# Altium PCB PCB.PcbDoc (part 1 of 2)
Units mm, origin at the board's own origin, x right, y up, seen from the top; angles counter-clockwise.
Board outline 90.42 x 81.53 mm, 4 copper layers (Top Copper, PWR, GND, Bottom Copper), stack 1.57 mm thick; 86 components, 100 nets, 390 pads, 138 vias.
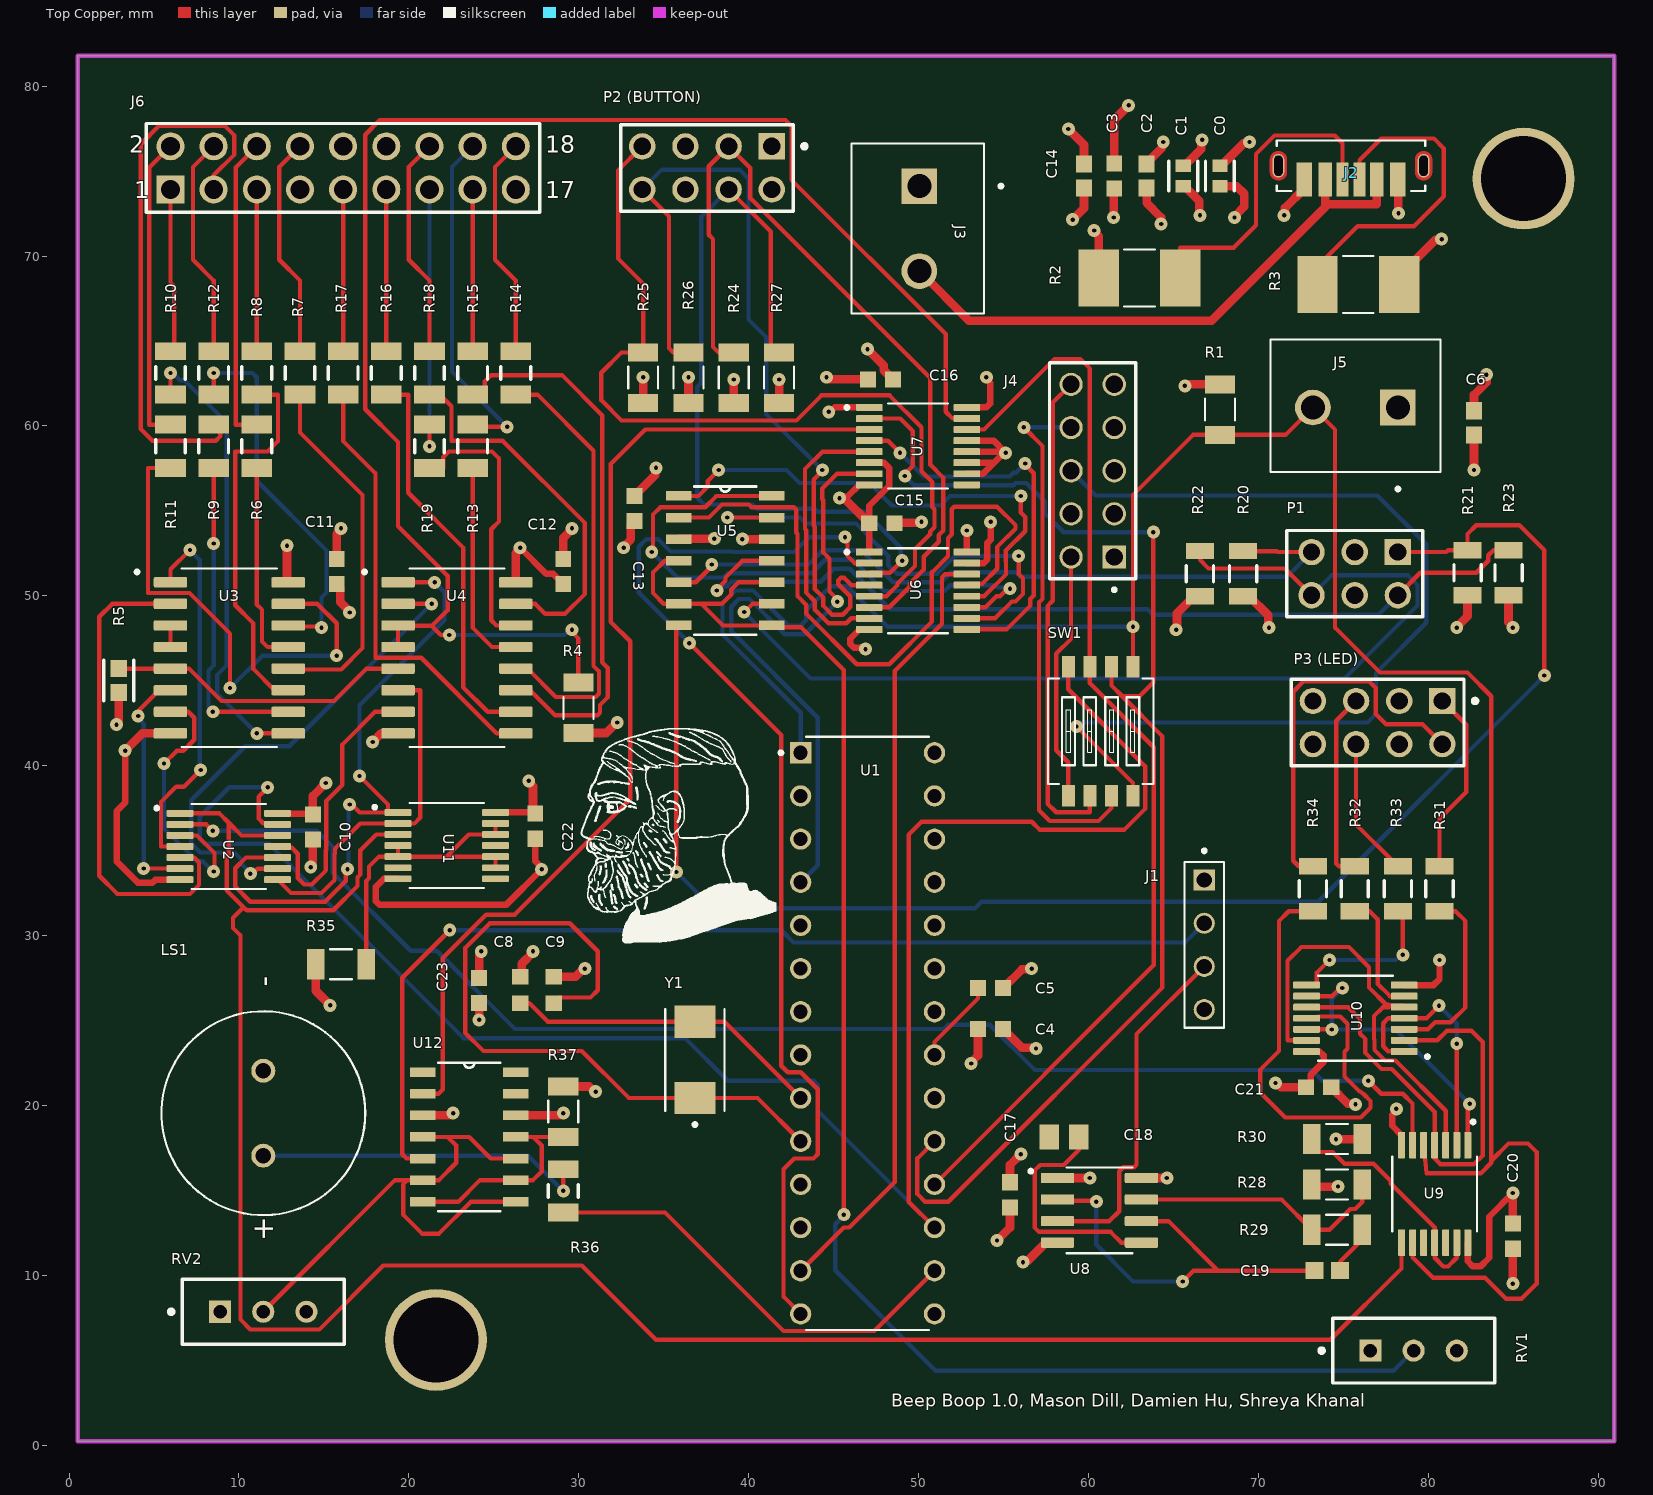
[diagram p0: Top Copper view]
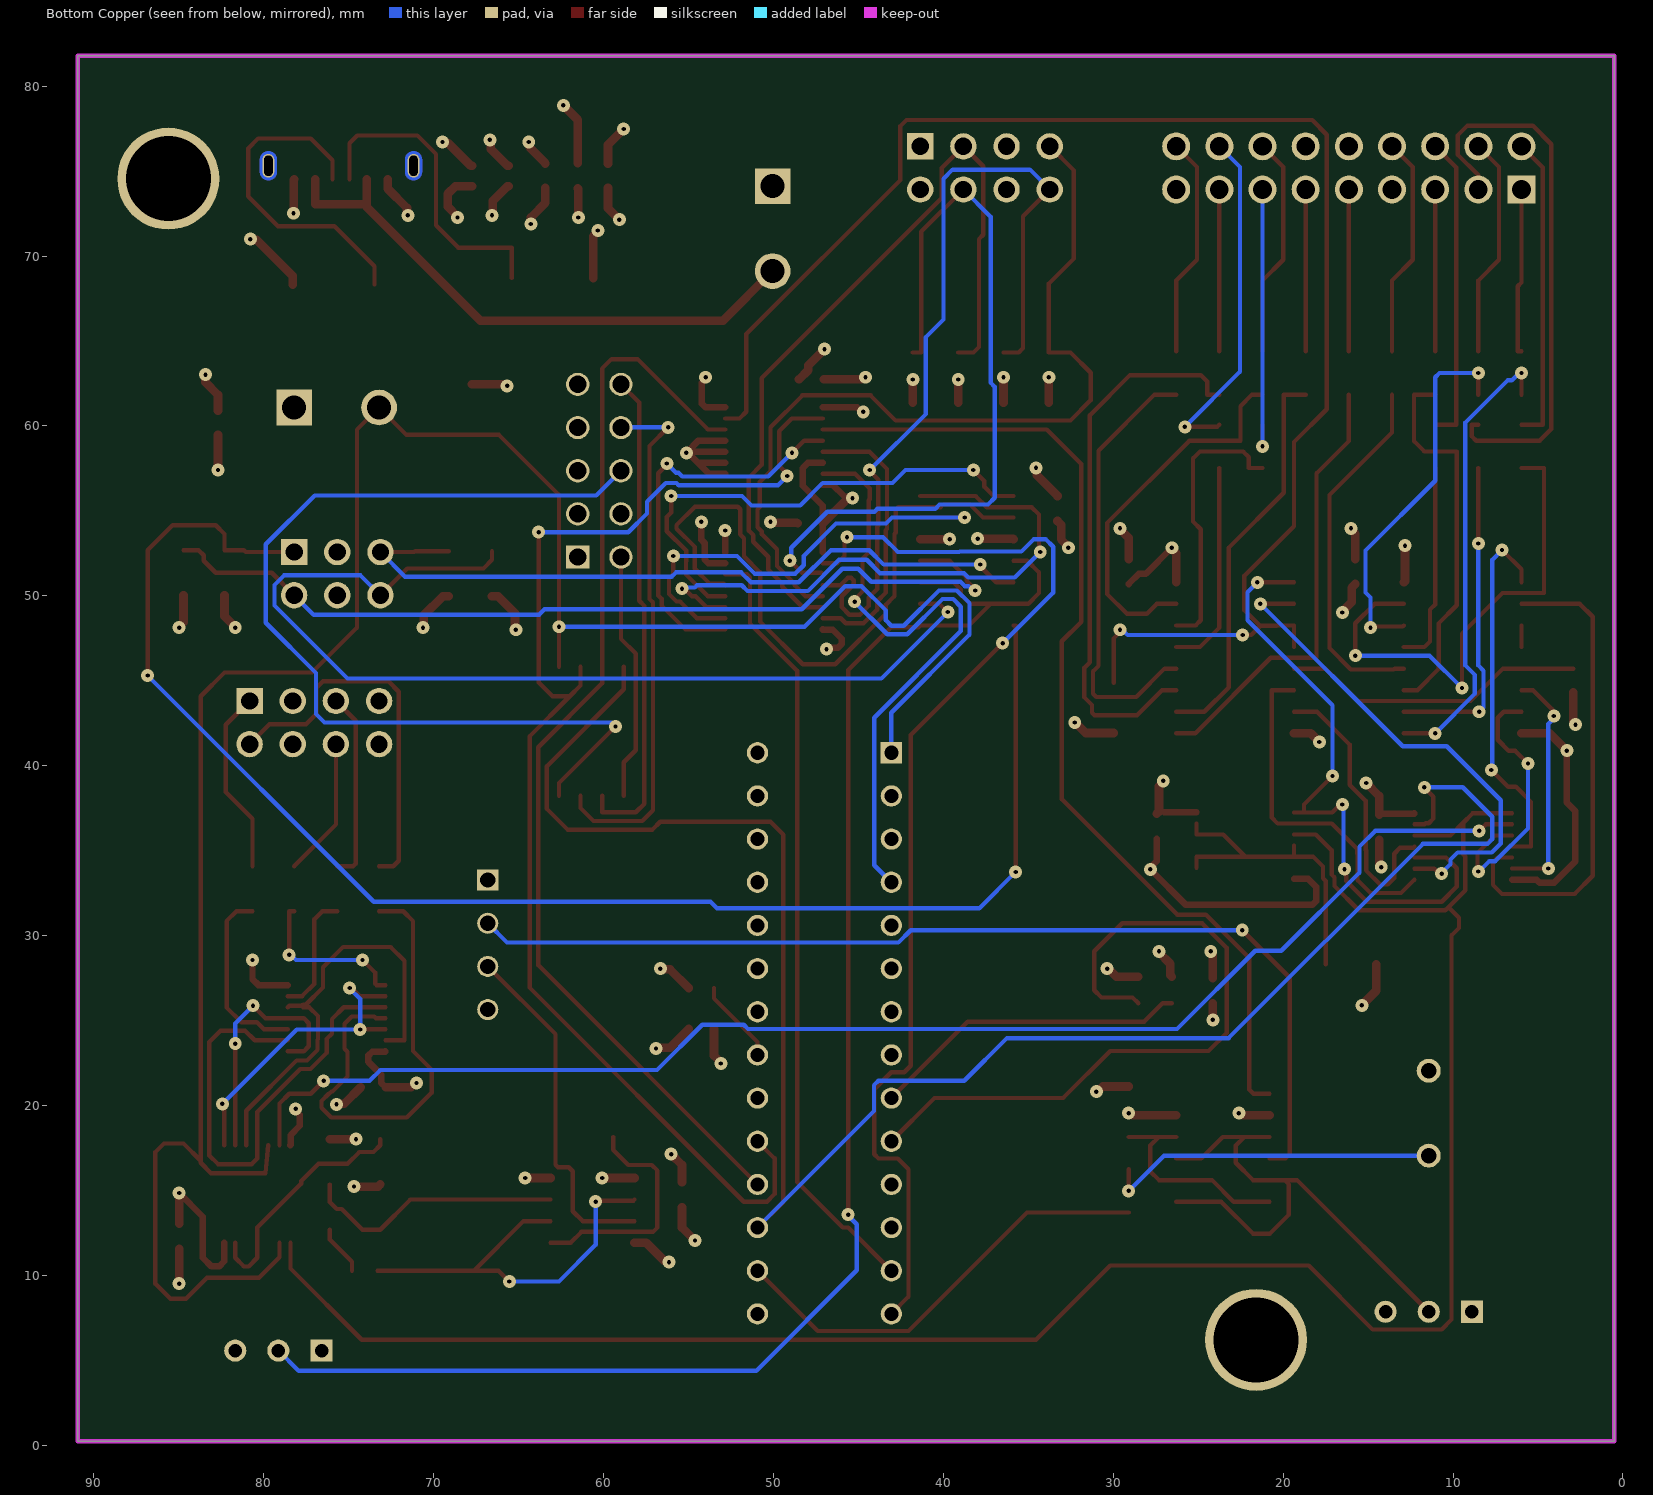
[diagram p1: Bottom Copper view, seen from below]
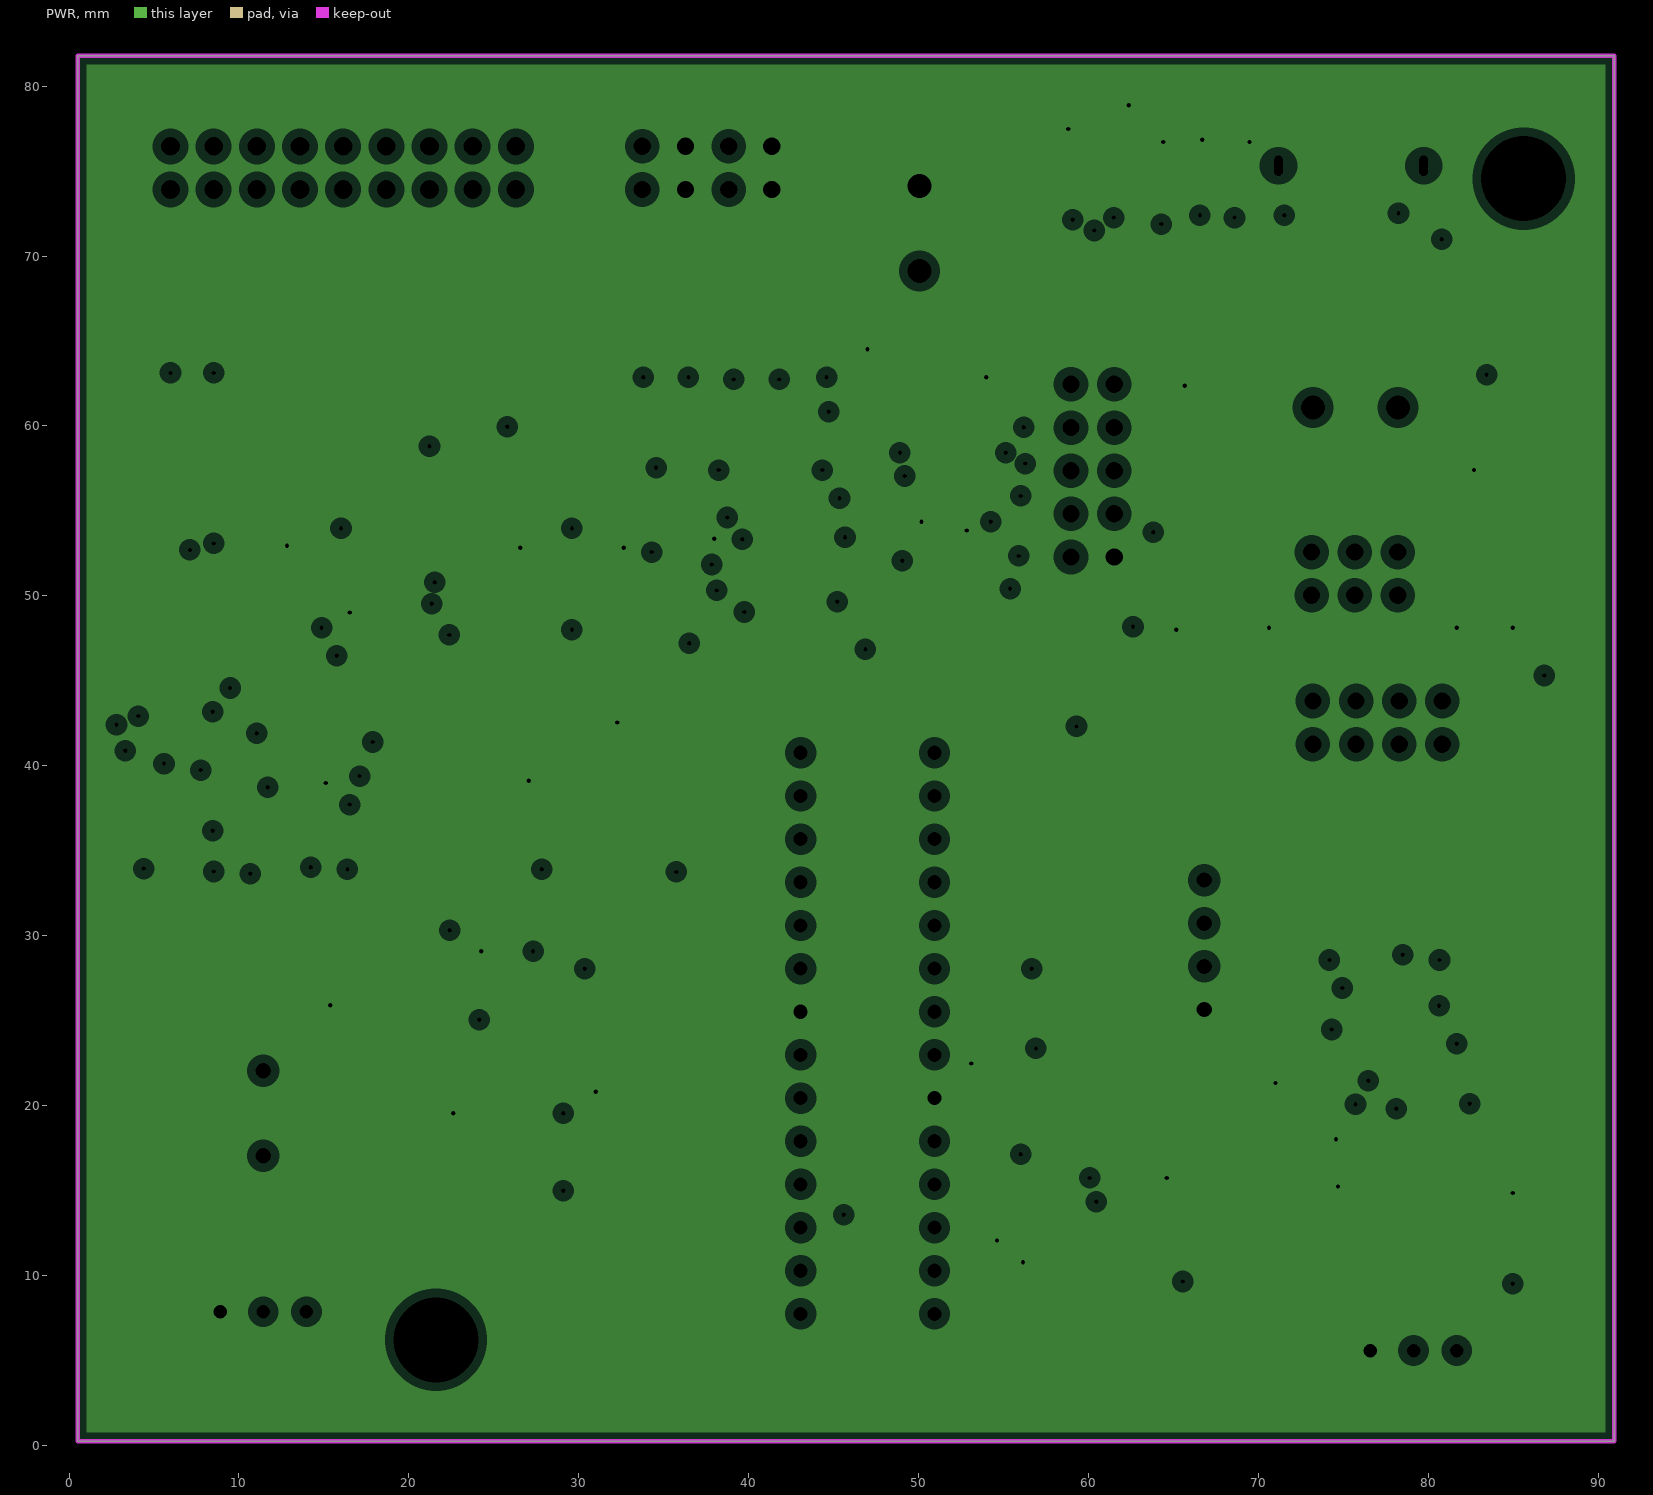
[diagram p2: PWR, clearances drawn from the general rule]
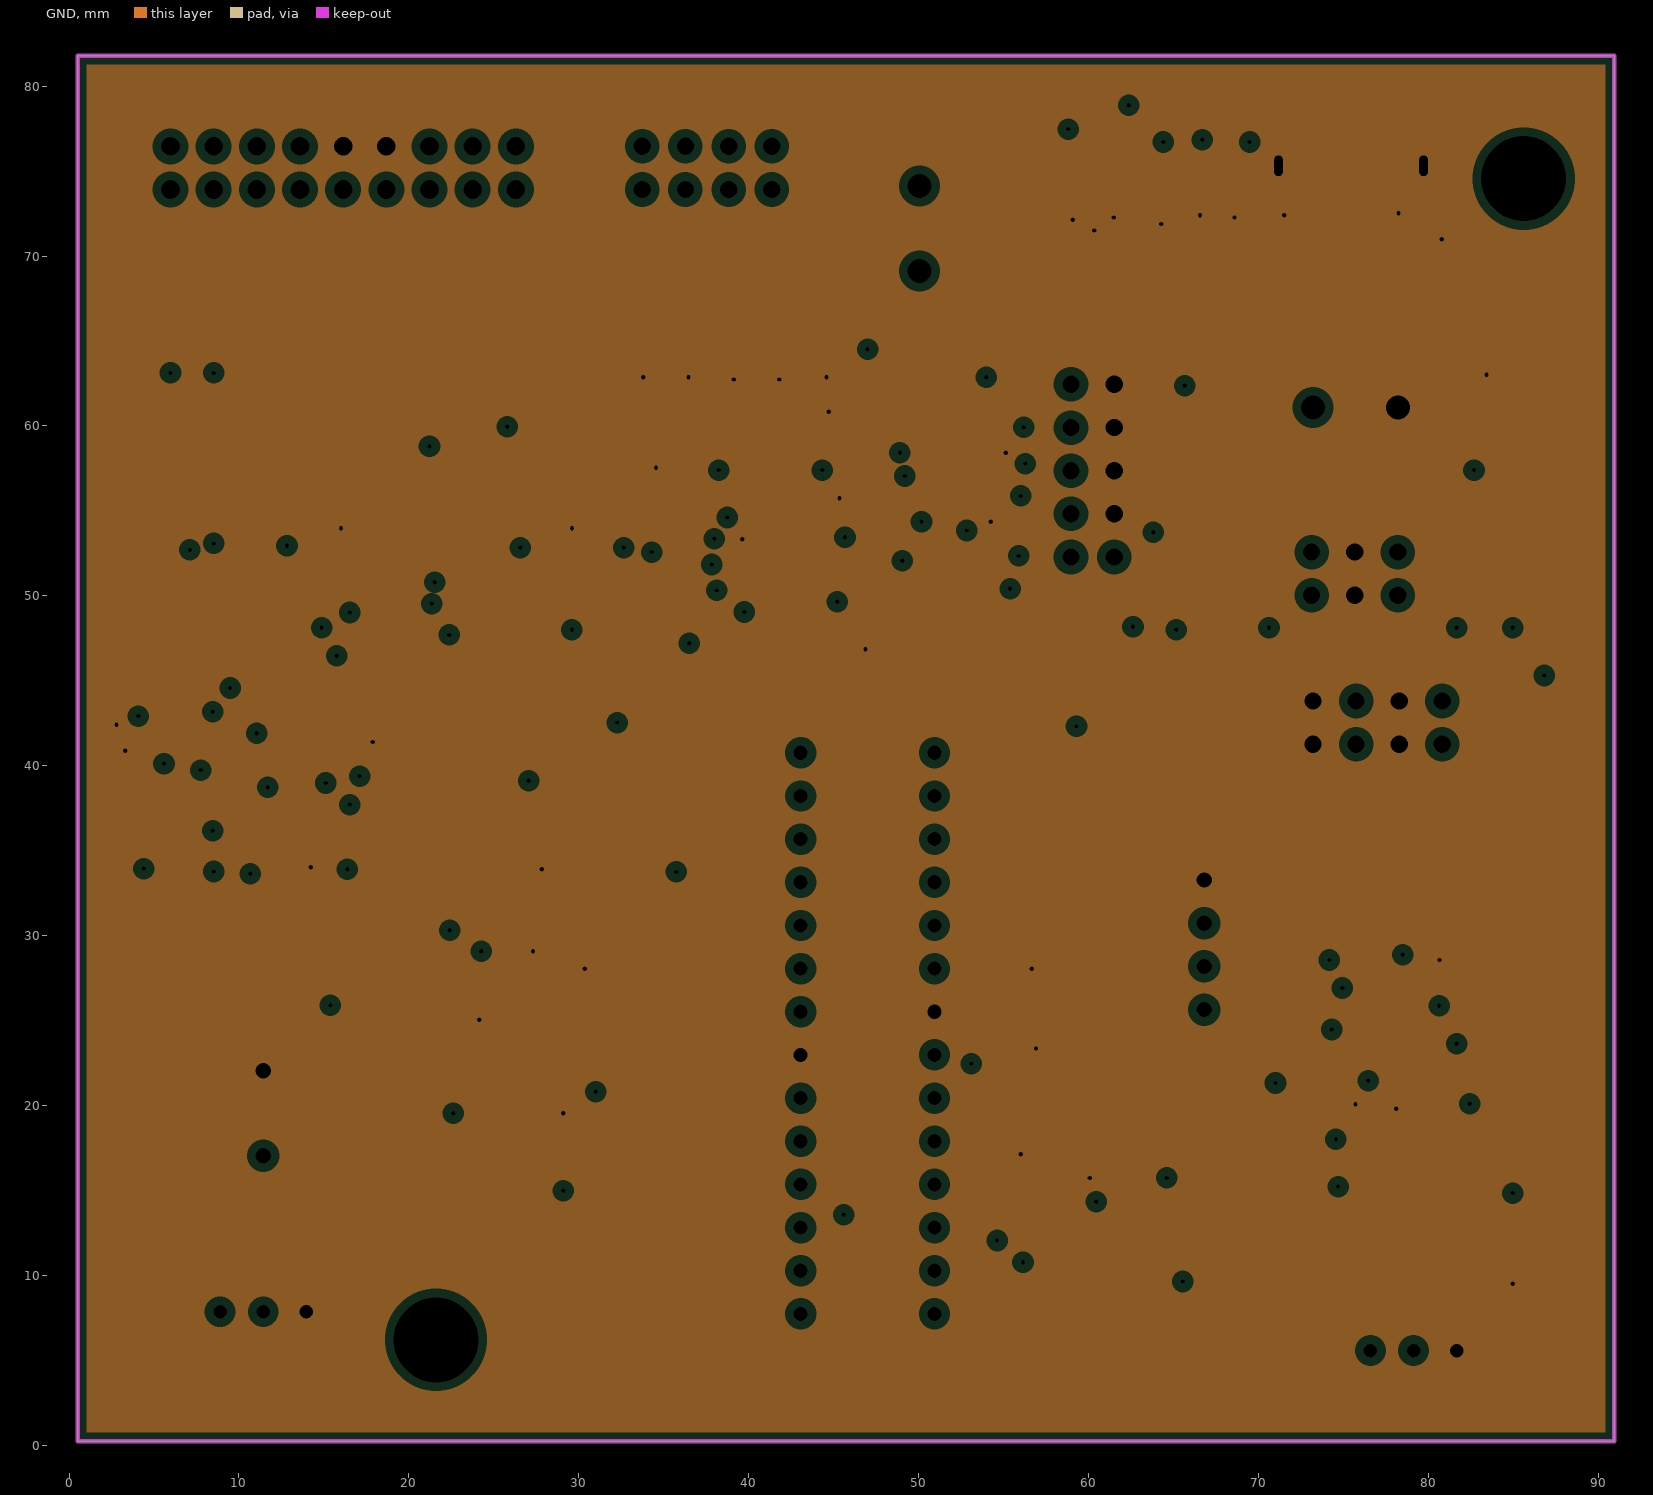
[diagram p3: GND, clearances drawn from the general rule]

## Layer stack, top to bottom
Top Mask: solder mask 0.015, Solder Resist, Dk 3.8
Top Copper: signal copper 0.035
Dielectric 1: prepreg 0.2, 7628, Dk 4.6
PWR: plane copper 0.0175, net +5
Core: core 1.065, FR-4, Dk 4.5
GND: plane copper 0.0175, net GND
Dielectric 2: prepreg 0.2, 7628, Dk 4.6
Bottom Copper: signal copper 0.035
Bottom Mask: solder mask 0.015, Solder Resist, Dk 3.8

## Board outline
0.508,0.254 0.508,81.788 90.932,81.788 90.932,0.254

## Design rules (kind name [scope] priority, off if disabled: settings)
Clearance [All] p1: gap=0.254 ignorepadtopadclearanceinfootprint=FALSE except(0: Arc-Hole Track-Hole SMDPad-Hole THPad-Hole Via-Hole Fill-Hole Poly-Hole Region-Hole Text-Hole; 0.2: Arc-SMDPad Track-SMDPad SMDPad-SMDPad)
HoleSize [All] p1: absolutevalues=TRUE maxlimit=6.3 minlimit=0.025 maxpercent=80.000 minpercent=20.000
MinimumSolderMaskSliver [All] p1: minsoldermaskwidth=0.127
PlaneClearance [All] p1: clearance=0.508
PlaneConnect [All] p1: planeconnectstyle=Direct reliefexpansion=0.508 reliefentries=4 reliefconductorwidth=0.254 reliefairgap=0.254
PolygonConnect [All] p1: connectstyle=Relief reliefconductorwidth=0.254 reliefentries=4 polygonreliefangle="90 Angle" airgapwidth=0.254
RoomDefinition Schematic [InComponentClass('Schematic')] p1: confinementstyle=ConfineIn formatcopy=TRUE lockcomponents=FALSE outline 1.143,0.762 87.757,0.762 87.757,81.28 1.143,81.28
RoutingVias [All] p1: holewidth=0.254 width=0.762 viastyle="Through Hole" minholewidth=0.254 minwidth=0.762 maxholewidth=0.254 maxwidth=0.762
SilkToSilkClearance [All] p1: silktosilkclearance=0.15
SilkToSolderMaskClearance [IsPad] p1: minsilkscreentomaskgap=0.15 clearancetoexposedcopper=TRUE
SolderMaskExpansion [All] p1: expansion=0.102 istentingtop=FALSE
Width "Schematic Width Constraint_2" [InNet('NetJ2_A9')] p1: maxlimit=0.508 minlimit=0.508 preferedwidth=0.508 minimp=50.000000 maximp=50.000000 favimp=50.000000
Width "Schematic Width Constraint_1" [InNet('GND')] p2: maxlimit=0.508 minlimit=0.254 preferedwidth=0.508 toplayer_prefwidth=0.381 minimp=50.000000 maximp=50.000000 favimp=50.000000
Width "Schematic Width Constraint" [InNet('+5')] p3: maxlimit=0.508 minlimit=0.254 preferedwidth=0.508 toplayer_prefwidth=0.381 minimp=50.000000 maximp=50.000000 favimp=50.000000
Width [All] p4: maxlimit=0.254 minlimit=0.254 preferedwidth=0.254
24 further rules are at their usual default settings.

## Components (designator, comment, footprint, x,y, rotation, side; value= is the part's Value field where it differs from the comment)
C0 "0.047 uF" FP-C0603C-CF-MFG 67.726,74.711 r270 top value="47,000 pF"
C1 "0.047 uF" FP-C0603C-CF-MFG 65.567,74.711 r270 top value="47,000 pF"
C2 "0.1uF" CAPC1608X90N#1 63.408,74.711 r270 top
C3 "0.1uF" CAPC1608X90N#2 61.503,74.711 r270 top
C4 "0.1uF" CAPC1608X90N#2 54.229,24.511 r0 top
C5 "0.1uF" CAPC1608X90N#2 54.229,26.924 r0 top
C6 "10uF" CAPC1608X90N#1 82.677,60.184 r90 top
C8 "22pF" CAPC1608X90N#3 26.543,26.81 r90 top
C9 "22pF" CAPC1608X90N#3 28.524,26.81 r90 top
C10 "0.1uF" CAPC1608X90N#2 14.351,36.395 r270 top
C11 "0.1uF" CAPC1608X90N#2 15.748,51.435 r90 top
C12 "0.1uF" CAPC1608X90N#2 29.083,51.435 r90 top
C13 "0.1uF" CAPC1608X90N#2 33.274,55.142 r90 top
C14 "10uF" CAPC1608X90N#1 59.725,74.711 r270 top
C15 "0.1uF" CAPC1608X90N#2 47.83,54.268 r180 top
C16 "0.1uF" CAPC1608X90N#2 47.752,62.738 r180 top
C17 "0.1uF" CAPC1608X90N#2 55.372,14.756 r90 top
C18 "10nF" CAPC2012X88N 58.547,18.161 r180 top
C19 "3.3uF" CAPC1608X90X35NL15T15 74.041,10.287 r180 top
C20 "0.1uF" CAPC1608X90N#2 84.963,12.319 r90 top
C21 "0.1uF" CAPC1608X90N#2 73.533,21.082 r180 top
C22 "0.1uF" CAPC1608X90N#2 27.432,36.449 r90 top
C23 "0.1uF" CAPC1608X90N#2 24.13,26.773 r90 top
J1 "5-146282-4" TE_5-146282-4 66.802,33.274 r270 top
J2 "UJC-VP-3-SMT-TR" CUI_UJC-VP-3-SMT-TR 75.438,75.311 r180 top
J3 "Master Switch" CUI_TB003-500-P02BE 50.038,74.111 r270 top
J4 "TSW-105-07-S-D-LL" SAMTEC_TSW-105-07-S-D-LL 61.503,52.285 r90 top
J5 "Game Reset" CUI_TB003-500-P02BE 78.196,61.087 r180 top
J6 "61301821121" 61301821121 16.129,75.184 r0 top
LS1 "CPT-1255C-090" CUI_CPT-1255C-090 11.43,19.558 r90 top
P1 "TSW-103-08-G-D" SMTC-TSW-103-08-X-D 78.196,52.578 r180 top
"P2 (BUTTON)" "TSW-104-08-L-D" SMTC-TSW-104-08-L-D_V 37.541,75.184 r180 top
"P3 (LED)" "TSW-104-08-L-D" SMTC-TSW-104-08-L-D_V 77.006,42.545 r180 top
R1 "10k Ohm" RESC3116X60N 67.726,60.96 r270 top
R2 "5.1k" RESC6332X120N 62.992,68.707 r0 top
R3 "5.1k" RESC6332X120N 75.871,68.326 r180 top
R4 "10k Ohm" RESC3116X60N 29.972,43.412 r90 top
R5 "RMCF0603FG1K00" FP-RMCF0603-IPC_B 2.921,45.019 r90 top
R6 "100 Ohm" FP-CRCW1206-e3-MFG 11.049,58.801 r90 top
R7 "100 Ohm" FP-CRCW1206-e3-MFG 13.589,63.119 r90 top
R8 "100 Ohm" FP-CRCW1206-e3-MFG 11.049,63.119 r90 top
R9 "100 Ohm" FP-CRCW1206-e3-MFG 8.509,58.801 r90 top
R10 "100 Ohm" FP-CRCW1206-e3-MFG 5.969,63.119 r90 top
R11 "100 Ohm" FP-CRCW1206-e3-MFG 5.969,58.801 r90 top
R12 "100 Ohm" FP-CRCW1206-e3-MFG 8.509,63.119 r90 top
R13 "100 Ohm" FP-CRCW1206-e3-MFG 23.749,58.801 r90 top
R14 "100 Ohm" FP-CRCW1206-e3-MFG 26.289,63.119 r90 top
R15 "100 Ohm" FP-CRCW1206-e3-MFG 23.749,63.119 r90 top
R16 "100 Ohm" FP-CRCW1206-e3-MFG 18.669,63.119 r90 top
R17 "100 Ohm" FP-CRCW1206-e3-MFG 16.129,63.119 r90 top
R18 "100 Ohm" FP-CRCW1206-e3-MFG 21.209,63.119 r90 top
R19 "100 Ohm" FP-CRCW1206-e3-MFG 21.209,58.801 r90 top
R20 "CRCW12062K20FKEA" FP-CRCW1206-e3-IPC_C 69.088,51.308 r90 top
R21 "CRCW12062K20FKEA" FP-CRCW1206-e3-IPC_C 82.296,51.364 r90 top
R22 "CRCW12062K20FKEA" FP-CRCW1206-e3-IPC_C 66.548,51.308 r90 top
R23 "CRCW12062K20FKEA" FP-CRCW1206-e3-IPC_C 84.709,51.364 r90 top
R24 "10k Ohm" RESC3116X60N 39.116,62.839 r90 top
R25 "10k Ohm" RESC3116X60N 33.782,62.839 r90 top
R26 "10k Ohm" RESC3116X60N 36.449,62.839 r90 top
R27 "10k Ohm" RESC3116X60N 41.783,62.839 r90 top
R28 "10k Ohm" RESC3116X60N 74.616,15.367 r180 top
R29 "10k Ohm" RESC3116X60N 74.616,12.7 r0 top
R30 "10k Ohm" RESC3116X60N 74.616,18.034 r0 top
R31 "2.2k" FP-CRCW1206-e3-IPC_C 80.645,32.766 r90 top
R32 "2.2k" FP-CRCW1206-e3-IPC_C 75.656,32.766 r90 top
R33 "2.2k" FP-CRCW1206-e3-IPC_C 78.196,32.766 r90 top
R34 "2.2k" FP-CRCW1206-e3-IPC_C 73.196,32.766 r90 top
R35 "10k Ohm" RESC3116X60N 16.002,28.321 r180 top
R36 "CRCW1206100RFKEA" FP-CRCW1206-e3-MFG 29.083,14.986 r90 top
R37 "10k Ohm" RESC3116X60N 29.083,19.646 r90 top
RV1 "3290W-1-203" BOUR-3290W 79.121,5.588 r0 top
RV2 "3290W-1-203" BOUR-3290W 11.43,7.874 r0 top
SW1 "1571983-5" SW_1571983-5 60.706,42.037 r0 top
U1 "ATMEGA328-PU" DIP787W46P254L3467H508Q28 46.99,24.257 r0 top
U2 "SN74HC393PWT" SOP65P640X120-14N#1 9.398,35.252 r0 top
U3 "CD4511BNSR" SOP127P780X200-16N 9.434,46.355 r0 top
U4 "CD4511BNSR" SOP127P780X200-16N 22.824,46.355 r0 top
U5 "LM339MX" SOIC127P630X170-14N 38.608,52.07 r0 top
U6 "SN74HC153PWT" SOP65P640X120-16N 49.962,50.303 r0 top
U7 "SN74HC153PWT" SOP65P640X120-16N 49.962,58.812 r0 top
U8 "MC1455BDR2G" SOIC127P599X175-8N 60.636,13.843 r0 top
U9 "SN74HC04PWT" SOP65P640X120-14N#2 80.361,14.808 r270 top
U10 "SN74HC08PW" SOP65P640X120-14N#2 75.692,25.146 r180 top
U11 "SN74HC08PW" SOP65P640X120-14N#1 22.225,35.306 r0 top
U12 "LM339MX" SOIC127P630X170-14N 23.546,18.161 r0 top
Y1 "16MHz" XTAL_ECS-160-20-23A-EN-TR 36.83,22.697 r90 top

## Footprints (in the part's own frame and the unit in brackets; to place one, negate y for a bottom-side part, rotate by r counter-clockwise, add the part's x,y. Pads: shape width x height; smd on the part's side, far side on the other; paste and mask are expansions set on the pad)
61301821121 [mm] "Pin Header, pitch 2.54 mm, THT, Vertical, dual row, 18p"
  rect 1.65x1.65 hole 1.1: 1(-10.16,-1.27)
  round 1.65 hole 1.1: 2(-10.16,1.27) 3(-7.62,-1.27) 4(-7.62,1.27) 5(-5.08,-1.27) 6(-5.08,1.27) 7(-2.54,-1.27) 8(-2.54,1.27) 9(0,-1.27) 10(0,1.27) 11(2.54,-1.27) 12(2.54,1.27) 13(5.08,-1.27) 14(5.08,1.27) 15(7.62,-1.27) 16(7.62,1.27) 17(10.16,-1.27) 18(10.16,1.27)
  silkscreen extent -11.58,-2.61 11.58,2.61, body extent -11.43,-2.54 11.43,2.54, height 8.59
BOUR-3290W [mm] "THD, 3-Leads, Body 9.53x3.81mm, Pitch 2.54mm"
  rect 1.3x1.3 hole 0.8: 1(-2.54,0)
  round 1.3 hole 0.8: 2(0,0) 3(2.54,0)
  silkscreen extent -5.54,-1.91 4.76,1.91, body extent -4.89,-2.01 4.89,2.01, height 10.86
CAPC1608X90N#1 [mm]
  rect 1.01x0.93 smd: 1(-0.709,0) 2(0.709,0)
  body extent -0.8,-0.4 0.8,0.4, height 0.9
CAPC1608X90N#2 [mm]
  rect 0.95x0.93 smd: 1(-0.738,0) 2(0.738,0)
CAPC1608X90N#3 [mm]
  rect 0.92x0.97 smd: 1(-0.775,0) 2(0.775,0)
CAPC1608X90X35NL15T15 [mm] "Chip Capacitor, 2-Leads, Body 1.60x0.81mm, IPC Medium Density"
  rect 1.05x1 smd: 1(-0.75,0) 2(0.75,0)
  body extent -0.88,-0.48 0.87,0.48, height 0.9
CAPC2012X88N [mm]
  rect 1.16x1.47 smd: 1(-0.875,0) 2(0.875,0)
CUI_CPT-1255C-090 [mm]
  round 1.408 hole 0.9: N(2.5,0) P(-2.5,0)
  silkscreen extent -6,-6 6,6
CUI_TB003-500-P02BE [mm]
  rect 2.1x2.1 hole 1.4: 1(0,0)
  round 2.1 hole 1.4: 2(5,0)
  silkscreen extent -2.5,-4 7.5,4.9
CUI_UJC-VP-3-SMT-TR [mm]
  rect 0.7x2 smd mask+0.05: A5(0.5,0.8) B5(-0.5,0.8)
  rect 0.8x2 smd mask+0.05: A9(-1.52,0.8) B9(1.52,0.8)
  rect 0.9x2 smd: A12(-2.75,0.8) B12(2.75,0.8)
  oval 0.7x1.4 hole 0.5 slot 1.2 at 90 deg mask+0: S1(-4.27,0) S2(4.27,0)
  Top Copper region: -4.244,0.849 -4.218,0.847 -4.192,0.844 -4.166,0.839 -4.141,0.833 -4.115,0.826 -4.091,0.817 -4.067,0.807 -4.043,0.796 -4.02,0.783 -3.998,0.769 -3.976,0.755 -3.955,0.739 -3.935,0.722 -3.916,0.704 -3.898,0.685 -3.881,0.665 -3.865,0.644 -3.851,0.622 -3.837,0.6 -3.824,0.577 -3.813,0.553 -3.803,0.529 -3.794,0.505 -3.787,0.479 -3.781,0.454 -3.776,0.428 -3.773,0.402 -3.771,0.376 -3.77,0.35 -3.77,-0.35 -3.771,-0.376 -3.773,-0.402 -3.776,-0.428 -3.781,-0.454 -3.787,-0.479 -3.794,-0.505 -3.803,-0.529 -3.813,-0.553 -3.824,-0.577 -3.837,-0.6 -3.851,-0.622 -3.865,-0.644 -3.881,-0.665 -3.898,-0.685 -3.916,-0.704 -3.935,-0.722 -3.955,-0.739 -3.976,-0.755 -3.998,-0.769 -4.02,-0.783 -4.043,-0.796 -4.067,-0.807 -4.091,-0.817 -4.115,-0.826 -4.141,-0.833 -4.166,-0.839 -4.192,-0.844 -4.218,-0.847 -4.244,-0.849 -4.27,-0.85 -4.296,-0.849 -4.322,-0.847 -4.348,-0.844 -4.374,-0.839 -4.399,-0.833 -4.425,-0.826 -4.449,-0.817 -4.473,-0.807 -4.497,-0.796 -4.52,-0.783 -4.542,-0.769 -4.564,-0.755 -4.585,-0.739 -4.605,-0.722 -4.624,-0.704 -4.642,-0.685 -4.659,-0.665 -4.675,-0.644 -4.689,-0.622 -4.703,-0.6 -4.716,-0.577 -4.727,-0.553 -4.737,-0.529 -4.746,-0.505 -4.753,-0.479 -4.759,-0.454 -4.764,-0.428 -4.767,-0.402 -4.769,-0.376 -4.77,-0.35 -4.77,0.35 -4.769,0.376 -4.767,0.402 -4.764,0.428 -4.759,0.454 -4.753,0.479 -4.746,0.505 -4.737,0.529 -4.727,0.553 -4.716,0.577 -4.703,0.6 -4.689,0.622 -4.675,0.644 -4.659,0.665 -4.642,0.685 -4.624,0.704 -4.605,0.722 -4.585,0.739 -4.564,0.755 -4.542,0.769 -4.52,0.783 -4.497,0.796 -4.473,0.807 -4.449,0.817 -4.425,0.826 -4.399,0.833 -4.374,0.839 -4.348,0.844 -4.322,0.847 -4.296,0.849 -4.27,0.85
  Top Copper region: 4.296,0.849 4.322,0.847 4.348,0.844 4.374,0.839 4.399,0.833 4.425,0.826 4.449,0.817 4.473,0.807 4.497,0.796 4.52,0.783 4.542,0.769 4.564,0.755 4.585,0.739 4.605,0.722 4.624,0.704 4.642,0.685 4.659,0.665 4.675,0.644 4.689,0.622 4.703,0.6 4.716,0.577 4.727,0.553 4.737,0.529 4.746,0.505 4.753,0.479 4.759,0.454 4.764,0.428 4.767,0.402 4.769,0.376 4.77,0.35 4.77,-0.35 4.769,-0.376 4.767,-0.402 4.764,-0.428 4.759,-0.454 4.753,-0.479 4.746,-0.505 4.737,-0.529 4.727,-0.553 4.716,-0.577 4.703,-0.6 4.689,-0.622 4.675,-0.644 4.659,-0.665 4.642,-0.685 4.624,-0.704 4.605,-0.722 4.585,-0.739 4.564,-0.755 4.542,-0.769 4.52,-0.783 4.497,-0.796 4.473,-0.807 4.449,-0.817 4.425,-0.826 4.399,-0.833 4.374,-0.839 4.348,-0.844 4.322,-0.847 4.296,-0.849 4.27,-0.85 4.244,-0.849 4.218,-0.847 4.192,-0.844 4.166,-0.839 4.141,-0.833 4.115,-0.826 4.091,-0.817 4.067,-0.807 4.043,-0.796 4.02,-0.783 3.998,-0.769 3.976,-0.755 3.955,-0.739 3.935,-0.722 3.916,-0.704 3.898,-0.685 3.881,-0.665 3.865,-0.644 3.851,-0.622 3.837,-0.6 3.824,-0.577 3.813,-0.553 3.803,-0.529 3.794,-0.505 3.787,-0.479 3.781,-0.454 3.776,-0.428 3.773,-0.402 3.771,-0.376 3.77,-0.35 3.77,0.35 3.771,0.376 3.773,0.402 3.776,0.428 3.781,0.454 3.787,0.479 3.794,0.505 3.803,0.529 3.813,0.553 3.824,0.577 3.837,0.6 3.851,0.622 3.865,0.644 3.881,0.665 3.898,0.685 3.916,0.704 3.935,0.722 3.955,0.739 3.976,0.755 3.998,0.769 4.02,0.783 4.043,0.796 4.067,0.807 4.091,0.817 4.115,0.826 4.141,0.833 4.166,0.839 4.192,0.844 4.218,0.847 4.244,0.849 4.27,0.85
  Bottom Copper region: -4.244,0.849 -4.218,0.847 -4.192,0.844 -4.166,0.839 -4.141,0.833 -4.115,0.826 -4.091,0.817 -4.067,0.807 -4.043,0.796 -4.02,0.783 -3.998,0.769 -3.976,0.755 -3.955,0.739 -3.935,0.722 -3.916,0.704 -3.898,0.685 -3.881,0.665 -3.865,0.644 -3.851,0.622 -3.837,0.6 -3.824,0.577 -3.813,0.553 -3.803,0.529 -3.794,0.505 -3.787,0.479 -3.781,0.454 -3.776,0.428 -3.773,0.402 -3.771,0.376 -3.77,0.35 -3.77,-0.35 -3.771,-0.376 -3.773,-0.402 -3.776,-0.428 -3.781,-0.454 -3.787,-0.479 -3.794,-0.505 -3.803,-0.529 -3.813,-0.553 -3.824,-0.577 -3.837,-0.6 -3.851,-0.622 -3.865,-0.644 -3.881,-0.665 -3.898,-0.685 -3.916,-0.704 -3.935,-0.722 -3.955,-0.739 -3.976,-0.755 -3.998,-0.769 -4.02,-0.783 -4.043,-0.796 -4.067,-0.807 -4.091,-0.817 -4.115,-0.826 -4.141,-0.833 -4.166,-0.839 -4.192,-0.844 -4.218,-0.847 -4.244,-0.849 -4.27,-0.85 -4.296,-0.849 -4.322,-0.847 -4.348,-0.844 -4.374,-0.839 -4.399,-0.833 -4.425,-0.826 -4.449,-0.817 -4.473,-0.807 -4.497,-0.796 -4.52,-0.783 -4.542,-0.769 -4.564,-0.755 -4.585,-0.739 -4.605,-0.722 -4.624,-0.704 -4.642,-0.685 -4.659,-0.665 -4.675,-0.644 -4.689,-0.622 -4.703,-0.6 -4.716,-0.577 -4.727,-0.553 -4.737,-0.529 -4.746,-0.505 -4.753,-0.479 -4.759,-0.454 -4.764,-0.428 -4.767,-0.402 -4.769,-0.376 -4.77,-0.35 -4.77,0.35 -4.769,0.376 -4.767,0.402 -4.764,0.428 -4.759,0.454 -4.753,0.479 -4.746,0.505 -4.737,0.529 -4.727,0.553 -4.716,0.577 -4.703,0.6 -4.689,0.622 -4.675,0.644 -4.659,0.665 -4.642,0.685 -4.624,0.704 -4.605,0.722 -4.585,0.739 -4.564,0.755 -4.542,0.769 -4.52,0.783 -4.497,0.796 -4.473,0.807 -4.449,0.817 -4.425,0.826 -4.399,0.833 -4.374,0.839 -4.348,0.844 -4.322,0.847 -4.296,0.849 -4.27,0.85
  Bottom Copper region: 4.296,0.849 4.322,0.847 4.348,0.844 4.374,0.839 4.399,0.833 4.425,0.826 4.449,0.817 4.473,0.807 4.497,0.796 4.52,0.783 4.542,0.769 4.564,0.755 4.585,0.739 4.605,0.722 4.624,0.704 4.642,0.685 4.659,0.665 4.675,0.644 4.689,0.622 4.703,0.6 4.716,0.577 4.727,0.553 4.737,0.529 4.746,0.505 4.753,0.479 4.759,0.454 4.764,0.428 4.767,0.402 4.769,0.376 4.77,0.35 4.77,-0.35 4.769,-0.376 4.767,-0.402 4.764,-0.428 4.759,-0.454 4.753,-0.479 4.746,-0.505 4.737,-0.529 4.727,-0.553 4.716,-0.577 4.703,-0.6 4.689,-0.622 4.675,-0.644 4.659,-0.665 4.642,-0.685 4.624,-0.704 4.605,-0.722 4.585,-0.739 4.564,-0.755 4.542,-0.769 4.52,-0.783 4.497,-0.796 4.473,-0.807 4.449,-0.817 4.425,-0.826 4.399,-0.833 4.374,-0.839 4.348,-0.844 4.322,-0.847 4.296,-0.849 4.27,-0.85 4.244,-0.849 4.218,-0.847 4.192,-0.844 4.166,-0.839 4.141,-0.833 4.115,-0.826 4.091,-0.817 4.067,-0.807 4.043,-0.796 4.02,-0.783 3.998,-0.769 3.976,-0.755 3.955,-0.739 3.935,-0.722 3.916,-0.704 3.898,-0.685 3.881,-0.665 3.865,-0.644 3.851,-0.622 3.837,-0.6 3.824,-0.577 3.813,-0.553 3.803,-0.529 3.794,-0.505 3.787,-0.479 3.781,-0.454 3.776,-0.428 3.773,-0.402 3.771,-0.376 3.77,-0.35 3.77,0.35 3.771,0.376 3.773,0.402 3.776,0.428 3.781,0.454 3.787,0.479 3.794,0.505 3.803,0.529 3.813,0.553 3.824,0.577 3.837,0.6 3.851,0.622 3.865,0.644 3.881,0.665 3.898,0.685 3.916,0.704 3.935,0.722 3.955,0.739 3.976,0.755 3.998,0.769 4.02,0.783 4.043,0.796 4.067,0.807 4.091,0.817 4.115,0.826 4.141,0.833 4.166,0.839 4.192,0.844 4.218,0.847 4.244,0.849 4.27,0.85
  silkscreen extent -4.37,-1.48 4.37,1.49
DIP787W46P254L3467H508Q28 [mm]
  rect 1.25x1.25 hole 0.83: 1(-3.937,16.51)
  round 1.25 hole 0.83: 2(-3.937,13.97) 3(-3.937,11.43) 4(-3.937,8.89) 5(-3.937,6.35) 6(-3.937,3.81) 7(-3.937,1.27) 8(-3.937,-1.27) 9(-3.937,-3.81) 10(-3.937,-6.35) 11(-3.937,-8.89) 12(-3.937,-11.43) 13(-3.937,-13.97) 14(-3.937,-16.51) 15(3.937,-16.51) 16(3.937,-13.97) 17(3.937,-11.43) 18(3.937,-8.89) 19(3.937,-6.35) 20(3.937,-3.81) 21(3.937,-1.27) 22(3.937,1.27) 23(3.937,3.81) 24(3.937,6.35) 25(3.937,8.89) 26(3.937,11.43) 27(3.937,13.97) 28(3.937,16.51)
  silkscreen extent -5.2,-17.45 3.62,17.46, body extent -3.95,-17.34 3.95,17.34, height 4.57
FP-C0603C-CF-MFG [mm]
  rect 0.75x0.9 smd paste+0 mask+0: 1(-0.6,0) 2(0.6,0)
  silkscreen extent -0.87,-0.85 0.88,0.85, body extent -1.2,-0.6 1.2,0.6, height 0.25
FP-CRCW1206-e3-IPC_C [mm]
  rect 0.956x1.658 smd paste+0 mask+0: 1(-1.326,0) 2(1.326,0)
  silkscreen extent -0.47,-0.8 0.47,0.8, body extent -1.9,-0.97 1.9,0.97, height 0.25
FP-CRCW1206-e3-MFG [mm]
  rect 1.05x1.8 smd paste+0 mask+0: 1(-1.275,0) 2(1.275,0)
  silkscreen extent -0.38,-0.87 0.38,0.87, body extent -1.9,-1 1.9,1, height 0.25
FP-RMCF0603-IPC_B [mm]
  rect 1.006x0.958 smd paste+0 mask+0: 1(-0.701,0) 2(0.701,0)
  silkscreen extent -1.2,-0.88 1.2,0.88, body extent -1.45,-0.73 1.45,0.73, height 0.25
RESC3116X60N [mm]
  rect 1.05x1.77 smd: 1(-1.485,0) 2(1.485,0)
  silkscreen extent -0.64,-0.88 0.64,0.88
RESC6332X120N [mm]
  rect 2.37x3.37 smd: 1(-2.405,0) 2(2.405,0)
  silkscreen extent -0.9,-1.68 0.9,1.68
SAMTEC_TSW-105-07-S-D-LL [mm]
  rect 1.37x1.37 hole 1.02: 01(0,0)
  round 1.37 hole 1.02: 02(0,2.54) 03(2.54,0) 04(2.54,2.54) 05(5.08,0) 06(5.08,2.54) 07(7.62,0) 08(7.62,2.54) 09(10.16,0) 10(10.16,2.54)
  silkscreen extent -2.02,-1.27 11.43,3.81
SMTC-TSW-103-08-X-D [mm] ".025 SQ Post Terminal Strip Assembly, 2x3 Pins, Vertical, 2.54mm Pitch, Male"
  rect 1.55x1.55 hole 1.02: 1(0,0)
  round 1.55 hole 1.02: 2(0,2.54) 3(2.54,0) 4(2.54,2.54) 5(5.08,0) 6(5.08,2.54)
  silkscreen extent -1.46,-1.27 6.54,3.81, body extent -1.27,-1.27 6.35,3.81, height 8.38
SMTC-TSW-104-08-L-D_V [mm] "CONN, 8-Leads, Body 10.16x5.08mm, Pitch 2.54mm"
  rect 1.55x1.55 hole 1.02: 1(-3.81,-1.27)
  round 1.55 hole 1.02: 2(-3.81,1.27) 3(-1.27,-1.27) 4(-1.27,1.27) 5(1.27,-1.27) 6(1.27,1.27) 7(3.81,-1.27) 8(3.81,1.27)
  silkscreen extent -5.86,-2.54 5.08,2.54, body extent -5.08,-2.54 5.08,2.54, height 8.38
SOIC127P599X175-8N [mm]
  rrect25% 1.97x0.6 smd: 1(-2.47,1.905) 2(-2.47,0.635) 3(-2.47,-0.635) 4(-2.47,-1.905) 5(2.47,-1.905) 6(2.47,-0.635) 7(2.47,0.635) 8(2.47,1.905)
  silkscreen extent -4.14,-2.53 1.95,2.53
SOIC127P630X170-14N [mil]
  rect 59x22 smd: 1(-108,150) 2(-108,100) 3(-108,50) 4(-108,0) 5(-108,-50) 6(-108,-100) 7(-108,-150) 8(108,-150) 9(108,-100) 10(108,-50) 11(108,0) 12(108,50) 13(108,100) 14(108,150)
  silkscreen extent -72,-172 72,172
SOP65P640X120-14N#1 [mm]
  rrect25% 1.57x0.4 smd mask+0.05: 1(-2.87,1.95) 2(-2.87,1.3) 3(-2.87,0.65) 4(-2.87,0) 5(-2.87,-0.65) 6(-2.87,-1.3) 7(-2.87,-1.95) 8(2.87,-1.95) 9(2.87,-1.3) 10(2.87,-0.65) 11(2.87,0) 12(2.87,0.65) 13(2.87,1.3) 14(2.87,1.95)
  silkscreen extent -4.34,-2.5 2.2,2.5
SOP65P640X120-14N#2 [mm]
  rrect25% 1.57x0.41 smd mask+0.05: 1(-2.87,1.95) 2(-2.87,1.3) 3(-2.87,0.65) 4(-2.87,0) 5(-2.87,-0.65) 6(-2.87,-1.3) 7(-2.87,-1.95) 8(2.87,-1.95) 9(2.87,-1.3) 10(2.87,-0.65) 11(2.87,0) 12(2.87,0.65) 13(2.87,1.3) 14(2.87,1.95)
  silkscreen extent -4.34,-2.5 2.2,2.5, body extent -3.2,-2.5 3.2,2.5, height 1.2
SOP65P640X120-16N [mm]
  rrect25% 1.57x0.41 smd mask+0.05: 1(-2.87,2.275) 2(-2.87,1.625) 3(-2.87,0.975) 4(-2.87,0.325) 5(-2.87,-0.325) 6(-2.87,-0.975) 7(-2.87,-1.625) 8(-2.87,-2.275) 9(2.87,-2.275) 10(2.87,-1.625) 11(2.87,-0.975) 12(2.87,-0.325) 13(2.87,0.325) 14(2.87,0.975) 15(2.87,1.625) 16(2.87,2.275)
  silkscreen extent -4.29,-2.5 1.76,2.5
SOP127P780X200-16N [mm]
  rrect25% 1.97x0.61 smd: 1(-3.465,4.445) 2(-3.465,3.175) 3(-3.465,1.905) 4(-3.465,0.635) 5(-3.465,-0.635) 6(-3.465,-1.905) 7(-3.465,-3.175) 8(-3.465,-4.445) 9(3.465,-4.445) 10(3.465,-3.175) 11(3.465,-1.905) 12(3.465,-0.635) 13(3.465,0.635) 14(3.465,1.905) 15(3.465,3.175) 16(3.465,4.445)
  silkscreen extent -5.53,-5.25 2.8,5.25
SW_1571983-5 [mm]
  rect 0.76x1.27 smd mask+0.05: 1.1(-1.905,-3.795) 1.2(-1.905,3.795) 4.1(1.905,-3.795) 4.2(1.905,3.795)
  rect 0.76x1.27 smd: 2.1(-0.635,-3.795) 2.2(-0.635,3.795) 3.1(0.635,-3.795) 3.2(0.635,3.795)
  silkscreen extent -3.1,-3.1 3.1,3.1
TE_5-146282-4 [mm]
  rect 1.24x1.24 hole 0.89: 1(0,0)
  round 1.24 hole 0.89: 2(2.54,0) 3(5.08,0) 4(7.62,0)
  silkscreen extent -1.82,-1.17 8.69,1.17
XTAL_ECS-160-20-23A-EN-TR [mm]
  rect 1.9x2.4 smd: 1(-2.25,0) 2(2.25,0)
  silkscreen extent -3.91,-1.75 3,1.75

## Part data
C0 C1: library part CMP-1035-02515-3, "CAP CER 0.047UF 100V 5% X7R 0603", Capacitance="47,000 pF", Manufacturer=KEMET, Manufacturer Part Number=C0603C473J1RACTU, Package=C0603C-CF, Temperature="-55°C to +125°C", Temperature Characteristic=X7R, Temperature Coefficient=30ppm/°C, Temperature Range High=+125°C, Temperature Range Low=-55°C, Tolerance=0.05, Voltage Rating="100 V", Automotive=Yes, Automotive Grade="Grade 1", Category=Cap, ComponentLink2Description=Datasheet, ComponentLink2URL=https://api.kemet.com/component-edge/download/datasheet/C0603C100J5GACAUTO.pdf, Device Class L1="Passive Components", Device Class L2=Capacitors, Device Class L3="Ceramic Capacitors", Digikey Description="CAP CER 0.047UF 100V 5% X7R 0603", Height=0.87mm, Lead Free=Yes, Material=Ceramic, Mouser Description="Multilayer Ceramic Capacitors MLCC - SMD/SMT 100volts 47000pF X7R 5%", Octopart=https://octopart.com/c0603c473j1ractu-kemet-17301356, RoHS=TRUE
C2 C3 C4 C5 C10 C11 C12 C13 C15 C16 C17 C20 C21 C22 C23: library part EMK107B7104KAHT, "0.1ÂµF Â±10% 16V Ceramic Capacitor X7R 0603 _1608 Metric_", Package="1608 Taiyo Yuden", Digi-Key_Part_Number=587-6004-1-ND, Digi-Key_Purchase_URL=https://www.digikey.in/product-detail/en/taiyo-yuden/EMK107B7104KAHT/587-6004-1-ND/8040667?utm_source=snapeda&utm_medium=aggregator&utm_campaign=symbol, MF="Taiyo Yuden", MP=EMK107B7104KAHT, SnapEDA_Link=https://www.snapeda.com/parts/EMK107B7104KAHT/Taiyo%20Yuden/view-part/588112/?ref=snap
C6 C14: library part C1608JB1A106K080AC, "10 ÂµF Â±10% 10V Ceramic Capacitor JB 0603 (1608 Metric)", Package="1608 TDK", Check_prices=https://www.snapeda.com/parts/C1608JB1A106K080AC/TDK/view-part/?ref=eda, Digi-Key_Part_Number=445-11201-2-ND, MF=TDK, MP=C1608JB1A106K080AC, Purchase-URL=https://pricing.snapeda.com/search/part/C1608JB1A106K080AC/?ref=eda, SnapEDA_Link=https://www.snapeda.com/parts/C1608JB1A106K080AC/TDK/view-part/?ref=snap
C8 C9: library part C0603C220J3GACAUTO, "22pF Â±5% 25V Ceramic Capacitor C0G, NP0 0603 _1608 Metric_", Package="0603 KEMET", Digi-Key_Part_Number=399-6864-1-ND, Digi-Key_Purchase_URL=https://www.digikey.com/product-detail/en/kemet/C0603C220J3GACAUTO/399-6864-1-ND/3314377?utm_source=snapeda&utm_medium=aggregator&utm_campaign=symbol, MF=KEMET, MP=C0603C220J3GACAUTO, SnapEDA_Link=https://www.snapeda.com/parts/C0603C220J3GACAUTO/KEMET/view-part/1772422/?ref=snap
C18: library part C0805C103K1RECAUTO, Package=None, Availability=Unavailable, MP=C0805C103K1RECAUTO, Price=None
C19: library part CMP-1035-02770-2, Manufacturer=Kemet, Part Number=C0603C335M9PACTU
J1: "Connector Header Through Hole 4 position 0.100 (2.54mm)", Package=None, Availability=Unavailable, DigiKey-Purchase-URL=https://snapeda.com/shop?store=DigiKey&id=2410903, EU_RoHS_Compliance=Compliant, MF="TE Connectivity", Mouser-Purchase-URL=https://snapeda.com/shop?store=Mouser&id=2410903, MP=5-146282-4, Price=None, SnapEDA_Link=https://www.snapeda.com/parts/5-146282-4/TE%20Connectivity%20AMP%20Connectors/view-part/2410903/?ref=snap
J2: "USB Receptacle", Package=None, Availability=Unavailable, MF="{'manufacturer': u'CUI'}", MP=UJC-VP-3-SMT-TR, Price=None
J3 J5: library part TB003-500-P02BE, "2~24 Poles, Screw Type, Horizontal, 5.0 Pitch, 26~14 _AWG_, Terminal Block Connector", Package=None, Availability=Unavailable, MF="CUI Devices", MP=TB003-500-P02BE, Price=None, SnapEDA_Link=https://www.snapeda.com/parts/TB003-500-P02BE/CUI%20Devices/view-part/3590637/?ref=snap
J4 U2 U3 U4 U10 U11: Package=None, Availability=Unavailable, Price=None
  J4: MP=TSW-105-07-S-D-LL
  U2: MP=SN74HC393PWT
  U3 U4: MP=CD4511BNSR
  U10 U11: MP=SN74HC08PW
J6: library part CMP-1502-01101-1, "THT Vertical Pin Header WR-PHD, Pitch 2.54 mm, Dual Row, 18 pins", Contact Resistance=20mOhm, Manufacturer="Wurth Elektronik", Operating Temperature=-40to105degC, Rated Current=3A, Withstanding Voltage=500VAC, Working Voltage=250VAC, Datasheet URL=https://katalog.we-online.de/em/datasheet/6130xx21121.pdf, Gender=Male, Manufacturer URL=http://www.we-online.de, Mounting Technology=THT, Orientation=Vertical, Package Reference=61301821121, Packaging=Bag, Part Number=61301821121, Pin Number=18, Pitch=2.54mm, Publisher=WurthElektronik, Row Number=Dual
LS1: "12 mm, 20 Vp-p, 80 dB, Through Hole, Piezo Audio Transducer Buzzer", Availability=Unavailable, MF="CUI Devices", MP=CPT-1255C-090, Price=None, SnapEDA_Link=https://www.snapeda.com/parts/CPT-1255C-090/CUI%20Devices/view-part/2202985/?ref=snap
P1: library part CMP-1024-00338-1, "0.025\" SQ Post Header, Through-hole, Vertical, -55 to 125 degC, 2.54 mm Pitch, 6-Pin, Male, RoHS", Manufacturer=Samtec, Temperature Range="-55 to 125 degC", ComponentLink1Description="Manufacturer URL", ComponentLink1URL=http://www.samtec.com, ComponentLink2Description=Datasheet, ComponentLink2URL=http://www.samtec.com/documents/webfiles/pdf/TSW_TH.PDF, ComponentLink3Description="Package Specification", ComponentLink3URL=http://www.samtec.com/documents/webfiles/cpdf/TSW-XXX-XX-XXX-X-XX-XXX-MKT.pdf, DatasheetVersion=F-214, Mounting Technology=Through-hole, Orientation=Vertical, PackageDescription=".025[0.64] SQ. Post Terminal Strip Assembly", PackageReference=TSW-103-08-X-D, PackageVersion="DM, 8/1988", PartNumber=TSW-103-08-G-D, Pitch="2.54 mm", RoHS=True
"P2 (BUTTON)" "P3 (LED)": library part CMP-1681-00006-4, "Male Header, Pitch 2.54 mm, 2 x 4 Position, Height 8.38 mm, Tail Length 5.08 mm, -55 to 125 degC, RoHS, Bulk", Colour=Black, Current Rating="7.6 A", Manufacturer=Samtec, Package Quantity=1, Voltage Rating="550 V", ComponentLink1Description="Manufacturer URL", ComponentLink1URL=http://www.samtec.com/, ComponentLink2Description=Datasheet, ComponentLink2URL=https://datasheet.ciiva.com/25616/0900766b81154476-25616879.pdf, ComponentLink3Description="Package Specification", ComponentLink3URL=http://suddendocs.samtec.com/prints/tsw-xxx-xx-x-x-xx-xxx-footprint.pdf, Contact Finish=Gold, Contact Material=Bronze, Contact Plating=Gold, DatasheetVersion=04/2012, Lead Pitch="0.1 inch", Mount="Through Hole", Mounting Technology="Through Hole", PackageDescription="Male Header, Pitch 2.54 mm, 2 x 4 Position, Height 8.38 mm, Tail Length 5.08 mm", PackageReference=TSW-104-08-L-D, Packaging=Bulk, Pins=8, REACH SVHC="No SVHC", RoHSCompliant=true, Rows=2
R1 R4 R24 R25 R26 R27 R28 R29 R30 R35 R37: library part CRCW120610K0DHEAP, Package=None, Availability=Unavailable, MP=CRCW120610K0DHEAP, Price=None
R2 R3: library part 35225K1FT, "Res Thick Film 2512 5.1K Ohm 1% 3W SMD T/R", Package=None, Availability=Unavailable, MP=35225K1FT, Price=None
R5: library part CMP-26527-003160-1, "1kΩ ±1% 0.1W 0603 Thick Film Chip Resistor AEC-Q200 compliant", Case Code (Imperial)=0603, Case Code (Metric)=1608, Max Operating Temperature=155°C, Max Power Dissipation=100mW, Min Operating Temperature=-55°C, Resistance=1kR, Resistor Type="Thick Film", Temperature Coefficient=100ppm/°C, Tolerance=1%, Case/Package=0603, Contact Plating=Tin, Features="Automotive AEC-Q200", Height=0.022inch, Lead Free="Lead Free", Length=0.061inch, Mount="Surface Mount", Number of Terminations=2, Packaging="Tape and Reel", Radiation Hardening=No, RoHS Compliant=Yes, Series=RMCF, Width=0.031inch
R6 R7 R8 R9 R10 R11 R12 R13 R14 R15 R16 R17 R18 R19 R36: library part CMP-2003-04801-2, "RES Thick Film, 100Ω, 1%, 0.25W, 100ppm/°C, 1206", Case Code (Imperial)=1206, Case Code (Metric)=3216, Max Operating Temperature=155°C, Min Operating Temperature=-55°C, Package Quantity=5000, Power Rating=250mW, Resistance=100R, Temperature Coefficient=100ppm/°C, Tolerance=1%, Voltage Rating=200V, Case/Package=1206, Composition="Thick Film", Contact Plating=Tin, Depth=1.6mm, Height=0.55mm, Lead Free="Lead Free", Length=3.2mm, Military Standard=Not, Mount="Surface Mount", Number of Pins=2, Packaging="Tape and Reel", Radiation Hardening=No, Termination=SMD/SMT, Voltage Rating (DC)=200V, Weight=0.000353oz, Width=1.6mm
R20 R21 R22 R23 R31 R32 R33 R34: library part CMP-2003-02034-2, "RES Thick Film, 2.2kΩ, 1%, 0.25W, 100ppm/°C, 1206", Case Code (Imperial)=1206, Case Code (Metric)=3216, Max Operating Temperature=155°C, Max Power Dissipation=250mW, Min Operating Temperature=-55°C, Package Quantity=10, Resistance=2.2kR, Temperature Coefficient=100ppm/°C, Tolerance=1%, Voltage Rating=200V, Case/Package=1206, Composition="Thick Film", Contact Plating=Tin, Depth=1.6mm, Features="Automotive AEC-Q200", Height=0.55mm, Lead Free="Lead Free", Length=3.2mm, Military Standard=Not, Number of Terminations=2, Packaging="Tape and Reel", Power Rating=250mW, Radiation Hardening=No, Termination=SMD/SMT, Voltage Rating (DC)=200V, Weight=0.000353oz, Width=1.6mm
RV1 RV2: library part CMP-2000-05581-1, "Trimming Potentiometer, 20 KOhm, 1 W, -65 to 150 degC, 3-Pin THD, RoHS, Tube", Manufacturer=Bourns, Package Description="3-Pin Through Hole Device, Body 9.53 x 3.81 mm, Pitch 2.54 mm", Package Reference=3290W, Power Rating=1W, Resistance Tolerance=±5%, Temperature Coefficient=±50ppm/°C, Track Resistance=20kohm, Datasheet URL=http://www.bourns.com/docs/Product-Datasheets/3290.pdf, Datasheet Version=04/2014, Manufacturer URL=http://www.bourns.com/, Mounting Technology=ThroughHole, No. of Turns=25, Potentiometer Mounting=ThroughHole, Product Range=AEC-Q2003290WSeries, SVHC=NoSVHC(15-Jun-2015)
SW1: "GDH04STR04=DIP SWITCH", Contact_Current_Rating=".1 A", Package="DIP-4 TE Connectivity", Voltage_Rating="50 VDC", Configuration_Pole-Throw="Single Pole - Single Throw", Digi-Key_Part_Number=450-1762-1-ND, Digi-Key_Purchase_URL=https://www.digikey.com/product-detail/en/te-connectivity-alcoswitch-switches/1571983-5/450-1762-1-ND/1207171?utm_source=snapeda&utm_medium=aggregator&utm_campaign=symbol, MF="TE Connectivity", MP=1571983-5, SnapEDA_Link=https://www.snapeda.com/parts/1571983-5/TE%20Connectivity%20ALCOSWITCH%20Switches/view-part/238185/?ref=snap, Switch_Type=DIP, TE_purchase_URL=https://www.te.com/usa-en/product-1571983-5.html?te_bu=Cor&te_type=disp&te_campaign=seda_glo_cor-seda-global-disp-prtnr-fy19-seda-model-bom-cta_sma-317_1&elqCampaignId=32493
U1: "AVR AVRÂ® ATmega Microcontroller IC 8-Bit 20MHz 32KB (16K x 16) FLASH 28-PDIP", Package="DIP-28 Microchip Technology", Availability="In Stock", Check_prices=https://www.snapeda.com/parts/ATMEGA328-PU/Microchip/view-part/?ref=eda, MF="Microchip Technology", MP=ATMEGA328-PU, Price=None, Purchase-URL=https://pricing.snapeda.com/search/part/ATMEGA328-PU/?ref=eda, SnapEDA_Link=https://www.snapeda.com/parts/ATMEGA328-PU/Microchip/view-part/?ref=snap
U5 U12: "Quad Comparator", Package=None, Availability=Unavailable, MP=LM339MX, Price=None
U6 U7: library part SN74HC153N, "IC MULTIPLEXER 2 X 4:1 16TSSOP", Package="PDIP-16 Texas Instruments", Availability=Good, Check_prices=https://www.snapeda.com/parts/SN74HC153N/Texas%20Instruments/view-part/494582/?ref=eda, MF="Texas Instruments", MP=SN74HC153N, Price=None, Purchase-URL=https://pricing.snapeda.com/search/part/SN74HC153N/?ref=eda, SnapEDA_Link=https://www.snapeda.com/parts/SN74HC153N/Texas%20Instruments/view-part/494582/?ref=snap
U8: library part NE555DR, "Single Precision Timer", Package="SOIC-8 Texas Instruments", Availability=Unavailable, DigiKey-Purchase-URL=https://snapeda.com/shop?store=DigiKey&id=44432, MF="Texas Instruments", Mouser-Purchase-URL=https://snapeda.com/shop?store=Mouser&id=44432, MP=NE555DR, Price=None, SnapEDA_Link=https://www.snapeda.com/parts/NE555DR/Texas%20Instruments/view-part/44432/?ref=snap, Texas_Instruments-Purchase-URL=https://snapeda.com/shop?store=Texas+Instruments&id=44432
U9: "Hex Inverters 14-TSSOP -40 to 85", Package="TSSOP-14 Texas Instruments", Check_prices=https://www.snapeda.com/parts/SN74HC04PWT/Texas+Instruments/view-part/?ref=eda, Digi-Key_Part_Number=296-SN74HC04PWTTR-ND, MF="Texas Instruments", MP=SN74HC04PWT, Purchase-URL=https://pricing.snapeda.com/search/part/SN74HC04PWT/?ref=eda, SnapEDA_Link=https://www.snapeda.com/parts/SN74HC04PWT/Texas+Instruments/view-part/?ref=snap
Y1: library part ECS-160-20-23A-EN-TR, "16MHz Â±30ppm Crystal 20pF 60 Ohms 2-SMD, No Lead", Package="SMD-2 ECS International", Digi-Key_Part_Number=XC982CT-ND, Digi-Key_Purchase_URL=https://www.digikey.com/product-detail/en/ecs-inc/ECS-160-20-23A-EN-TR/XC982CT-ND/465170?utm_source=snapeda&utm_medium=aggregator&utm_campaign=symbol, MF="ECS Inc.", MP=ECS-160-20-23A-EN-TR, SnapEDA_Link=https://www.snapeda.com/parts/ECS-160-20-23A-EN-TR/ECS%20Inc./view-part/2122002/?ref=snap

## Free pads (board coordinates)
  round 6 hole 5: 4(21.59,6.223) 6.(85.598,74.549)

## Via types
v1: diameter 0.762, hole 0.254, Top Copper to Bottom Copper, 138 vias

## Nets (pads, with @x,y where several pads share a name; then routed paths per layer and width w, separated by ;. In a path a pad name is that pad's centre, name@x,y a point inside that pad or via, vN(x,y) a via of type N, cw(c..) or ccw(c..) an arc to the next point about the centre after c; other vN are vias at no path point)
+5: "P2 (BUTTON).1" "P2 (BUTTON).2" "P2 (BUTTON).5" "P2 (BUTTON).6" C0.1 C1.1 C2.1 C3.1 C4.1 C6.1 C10.1 C11.1 C12.1 C13.1 C14.1 C15.1 C16.1 C17.1 C20.2 C21.2 C22.2 C23.2 J1.4 J3.1 J4.01 R1.1 R4.1 R20.1 R21.1 R22.1 R23.1 R28.2 R30.2 R35.2 R37.2 RV1.1 RV2.1 U1.7 U1.20 U2.14 U3.16 U4.16 U5.3 U6.16 U7.16 U8.4 U8.8 U9.14 U10.14 U11.14 U12.3 | length 93.1
  Top Copper w0.381: U2.14@12.268,37.202 12.282,37.188 14.297,37.188 C10.1@14.351,37.133 ; U11.14@25.095,37.256 C22.2@26.982,37.256 ; v1(26.543,52.832) 28.067,51.308 28.482,51.308 29.083,50.707 C12.1@29.083,50.697 ; U6.16@52.832,52.578 v1(52.832,53.848) ; U7.16@52.832,61.087 53.975,61.087 54.198,61.31 54.198,62.539 53.975,62.762 v1(53.975,62.865) ; C21.2@72.795,21.082 72.805,21.082 73.08,21.357 73.08,21.833 73.824,22.577 73.824,22.958 73.6,23.181 72.837,23.181 U10.14@72.822,23.196 ; U9.14@82.311,11.938 82.311,10.839 82.609,10.541 83.058,10.541 83.566,11.049 83.566,13.462 v1(84.963,14.859)
  Top Copper w0.508: v1(12.827,52.959) 12.827,50.851 12.878,50.8 U3.16@12.899,50.8 ; C10.1@14.351,37.133 14.351,38.227 v1(15.113,38.989) ; R35.2@14.517,28.321 14.517,26.758 v1(15.367,25.908) ; C11.1@15.748,50.697 15.959,50.486 15.959,49.642 16.51,49.091 v1(16.51,49.022) ; U12.3@20.803,19.431 22.41,19.431 22.537,19.558 v1(22.606,19.558) ; C23.2@24.13,27.511 24.13,28.887 24.257,29.014 v1(24.257,29.083) ; U4.16@26.289,50.8 26.289,52.509 26.543,52.763 v1(26.543,52.832) ; v1(27.051,39.116) 27.051,39.047 27.305,38.793 27.305,37.314 C22.2@27.432,37.187 ; R37.2@29.083,21.131 30.616,21.131 30.919,20.828 v1(30.988,20.828) ; R4.1@29.972,41.927 31.619,41.927 32.237,42.545 v1(32.258,42.545) ; v1(32.639,52.832) 32.639,52.901 33.063,53.325 33.063,54.193 C13.1@33.274,54.404 ; U5.3@35.865,53.34 35.879,53.355 37.958,53.355 v1(37.973,53.369) ; v1(46.99,64.516) 47.943,63.563 47.943,63.275 48.48,62.738 C16.1@48.49,62.738 ; C15.1@48.568,54.268 48.612,54.312 50.121,54.312 v1(50.165,54.356) ; v1(53.086,22.479) 53.086,22.548 53.491,22.953 C4.1@53.491,24.511 ; v1(54.61,12.065) 55.372,12.827 C17.1@55.372,14.018 ; v1(56.134,10.795) 56.183,10.844 56.387,10.844 57.481,11.938 U8.4@58.166,11.938 ; v1(58.801,77.47) 59.725,76.546 C14.1@59.725,75.42 ; C3.1@61.503,75.449 61.503,78.013 v1(62.357,78.867) ; U8.8@63.106,15.748 v1(64.599,15.748) ; C2.1@63.408,75.42 63.408,75.46 64.34,76.393 64.34,76.659 v1(64.389,76.708) ; v1(65.151,48.006) 65.2,48.055 65.2,48.985 66.197,49.982 R22.1@66.548,49.982 ; C1.1@65.567,75.311 65.642,75.311 66.626,76.296 66.626,76.786 v1(66.675,76.835) ; v1(65.659,62.357) 65.728,62.357 65.816,62.445 R1.1@67.726,62.445 ; C0.1@67.726,75.311 67.801,75.311 69.149,76.659 69.42,76.659 v1(69.469,76.708) ; R20.1@69.088,49.982 69.439,49.982 70.563,48.858 70.563,48.182 v1(70.612,48.133) ; v1(70.993,21.336) 71.062,21.336 71.316,21.082 C21.2@72.795,21.082 ; R28.2@73.131,15.367 73.258,15.24 v1(74.676,15.24) ; v1(74.549,18.034) R30.2@76.101,18.034 ; v1(81.661,48.133) 81.661,48.163 82.296,48.798 R21.1@82.296,50.038 ; v1(82.677,57.404) C6.1@82.677,59.475 ; R23.1@84.709,50.038 84.709,48.456 84.963,48.202 v1(84.963,48.133) ; C20.2@84.963,13.057 v1(84.963,14.859)
A: U9.1 U10.9 U10.12 | length 18.9
  Top Copper w0.254: U10.12@72.822,24.496 74.297,24.496 v1(74.308,24.486) ; U10.9@72.822,26.446 74.33,26.446 74.808,26.924 v1(74.93,26.924) ; U9.1@82.311,17.678 82.311,19.994 v1(82.423,20.106)
  Bottom Copper w0.254: v1(74.93,26.924) 74.93,26.897 74.308,26.274 v1(74.308,24.486) 78.044,24.486 v1(82.423,20.106)
AMUXA: SW1.2.2 U1.18 U7.14 | length 64.1
  Top Copper w0.254: U1.18@50.927,15.367 63.83,28.27 63.83,41.097 60.071,44.856 SW1.2.2@60.071,45.832 60.071,63.373 59.512,63.932 57.993,63.932 53.848,59.787 U7.14@52.832,59.787
AMUXB: SW1.3.2 U1.19 U7.2 | length 76.7
  Top Copper w0.254: U7.2@47.092,60.437 48.91,60.437 49.657,59.69 49.657,57.658 49.182,57.183 v1(49.182,57.056) ; U1.19@50.927,17.907 49.921,16.901 49.921,14.798 50.368,14.351 51.74,14.351 64.338,26.949 64.338,41.732 61.976,44.094 ; SW1.3.2@61.341,45.832 61.341,44.729 61.976,44.094 ; v1(63.805,53.746) 63.805,44.907 62.992,44.094 61.976,44.094
  Bottom Copper w0.254: v1(49.182,57.056) 49.722,56.515 55.564,56.515 55.691,56.642 56.323,56.642 57.428,55.536 57.428,54.852 58.534,53.746 v1(63.805,53.746)
ANOT: U9.2 U10.1 U10.4 | length 15.1
  Top Copper w0.254: U10.1@78.562,23.196 77.629,23.196 77.33,23.495 77.33,24.854 77.622,25.146 U10.4@78.562,25.146 79.883,25.146 v1(80.62,25.883) ; U9.2@81.661,17.678 v1(81.661,23.647)
  Bottom Copper w0.254: v1(80.62,25.883) 81.661,24.841 v1(81.661,23.647)
B: U9.3 U10.5 U10.13 | length 26
  Top Copper w0.254: U10.13@72.822,23.846 71.704,23.846 71.704,28.524 72.517,29.337 75.311,29.337 76.5,28.148 76.5,26.951 77.514,25.938 77.648,25.938 77.672,25.914 77.755,25.914 77.795,25.874 78.484,25.874 U10.5@78.562,25.796 ; 77.672,25.796 77.313,25.796 76.79,25.273 76.79,23.921 76.822,23.889 76.822,23.285 77.443,22.664 78.047,22.664 81.011,19.7 U9.3@81.011,17.678
BINA: U2.10 U4.1 U11.1 | length 37.5
  Top Copper w0.254: U2.10@12.268,34.602 10.414,34.602 9.779,33.967 9.779,32.893 10.668,32.004 15.069,32.004 16.286,33.22 16.286,33.818 v1(16.383,33.915) ; v1(16.51,37.719) 16.647,37.719 17.11,37.256 U11.1@18.771,37.256 ; v1(17.094,39.395) 18.771,37.719 U11.1@18.771,37.256 ; U11.1@19.355,37.256 U11.1@18.771,37.256 ; U4.1@19.359,50.8 v1(21.514,50.8)
  Bottom Copper w0.254: v1(16.383,33.915) 16.447,33.979 16.447,37.655 v1(16.51,37.719) ; v1(17.094,39.395) 17.094,43.561 22.098,48.565 22.098,50.216 v1(21.514,50.8)
BINB: U2.8 U4.6 U11.2 | length 20.4
  Top Copper w0.254: U2.8@12.268,33.302 13.058,32.512 14.859,32.512 15.621,33.274 15.621,34.806 15.651,34.836 15.651,35.12 17.137,36.606 U11.2@19.355,36.606 20.32,36.606 20.671,36.957 20.671,44.45 U4.6@19.359,44.45
BNOT: U9.4 U10.2 U10.10 | length 28.8
  Top Copper w0.254: U10.10@72.822,25.796 75.271,25.796 75.971,25.095 75.971,24.232 76.282,23.921 76.282,23.106 77.232,22.156 77.837,22.156 80.361,19.632 U9.4@80.361,17.678 80.361,16.891 80.691,16.561 82.677,16.561 83.185,17.069 83.185,23.749 82.525,24.409 81.081,24.409 80.518,23.846 U10.2@78.562,23.846